# Altium PCB Contactor_Switching.pcbdoc
Units mil, origin at the board's own origin, x right, y up, seen from the top; angles counter-clockwise.
Board outline 5617.5 x 3410 mil, 2 copper layers (Top Layer, Bottom Layer); 30 components, 20 nets, 69 pads, 0 vias.
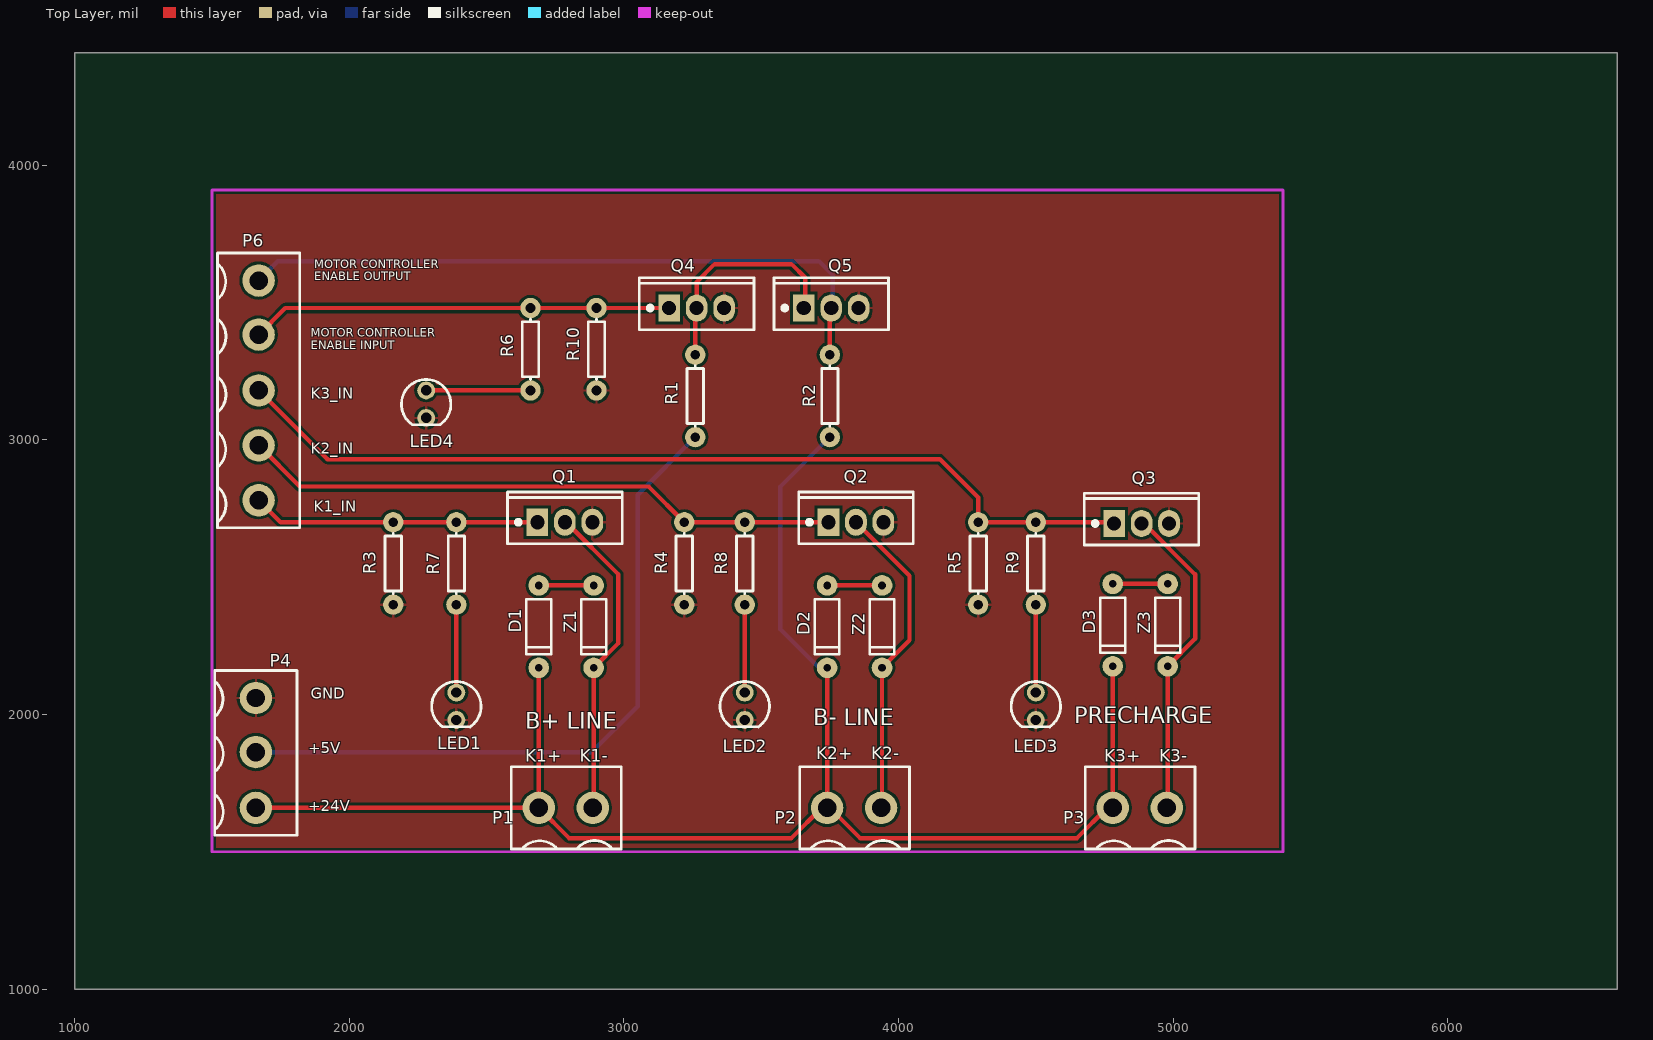
[diagram p0: Top Layer view]
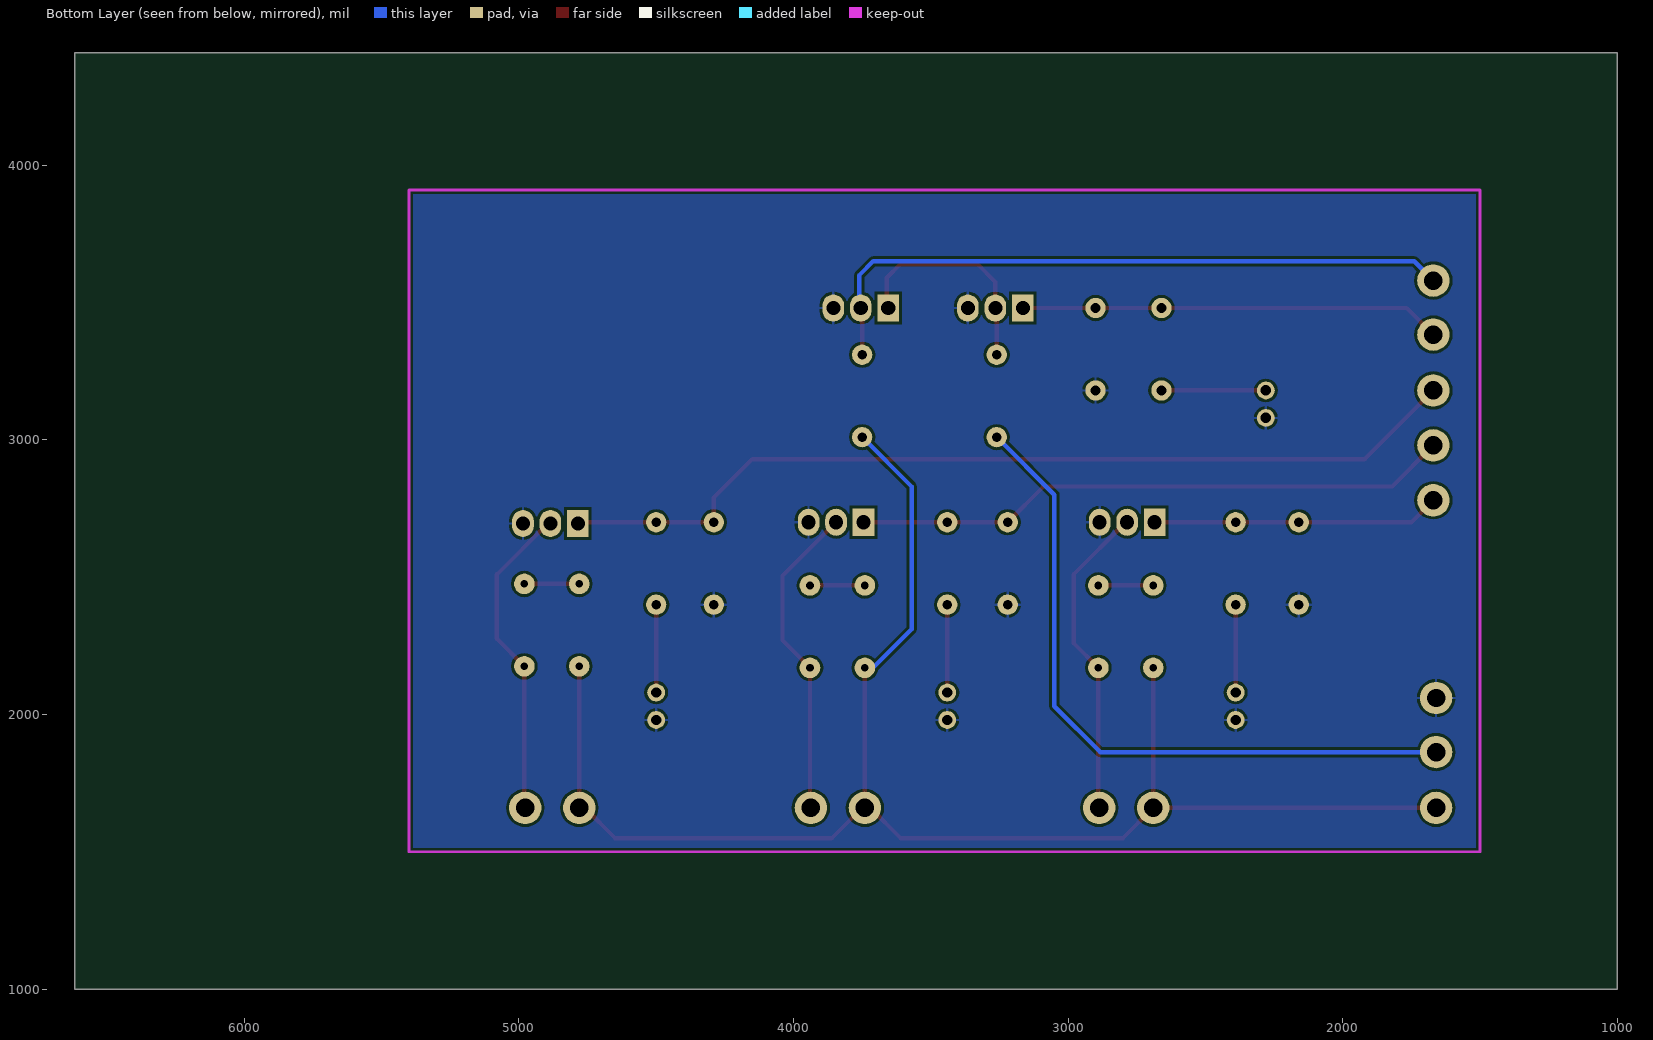
[diagram p1: Bottom Layer view, seen from below]

## Layer stack, top to bottom
Top Solder: solder mask 0.4, Solder Resist, Dk 3.5
Top Layer: signal copper 1.4
Dielectric1: dielectric 12.6, FR-4, Dk 4.8
Bottom Layer: signal copper 1.4
Bottom Solder: solder mask 0.4, Solder Resist, Dk 3.5

## Board outline
6617.5,1000 1000,1000 1000,4410 6617.5,4410

## Design rules (kind name [scope] priority, off if disabled: settings)
Clearance [All] p1: gap=10 ignorepadtopadclearanceinfootprint=FALSE except(0: Arc-Hole Track-Hole SMDPad-Hole THPad-Hole Via-Hole Fill-Hole Poly-Hole Region-Hole Text-Hole)
PolygonConnect [All] p1: connectstyle=Relief reliefconductorwidth=10 reliefentries=4 polygonreliefangle="90 Angle" airgapwidth=10
RoutingVias [All] p1: holewidth=28 width=50 viastyle="Through Hole" minholewidth=28 minwidth=50 maxholewidth=28 maxwidth=50
SolderMaskExpansion [All] p1: expansion=4
Width [All] p1: maxlimit=10 minlimit=10 preferedwidth=10
30 further rules are at their usual default settings.

## Components (designator, comment, footprint, x,y, rotation, side; value= is the part's Value field where it differs from the comment)
D1 "DO-35" DO-35 2690,2470 r270 top
D2 "DO-35" DO-35 3740,2470 r270 top
D3 "DO-35" DO-35 4780,2475.5 r270 top
LED1 "LED-3MM/2.54" LED-3MM/2.54 2390,2080 r0 top
LED2 "LED-3MM/2.54" LED-3MM/2.54 3440,2080 r0 top
LED3 "LED-3MM/2.54" LED-3MM/2.54 4500,2080 r0 top
LED4 "LED-3MM/2.54" LED-3MM/2.54 2280,3180 r0 top
P1 "WJ2EDGVC-5.08-2P" WJ2EDGVC-5.08-2P 2790,1660 r0 top
P2 "WJ2EDGVC-5.08-2P" WJ2EDGVC-5.08-2P 3840,1660 r0 top
P3 "WJ2EDGVC-5.08-2P" WJ2EDGVC-5.08-2P 4880,1660 r0 top
P4 "WJ2EDGVC-5.08-3P" WJ2EDGVC-5.08-3P 1660,1860 r270 top
P6 "WJ2EDGVC-5.08-5P" WJ2EDGVC-5.08-5P 1670,3180 r270 top
Q1 "TO-220(TO-220-3)" TO-220(TO-220-3) 2690,2700 r90 top
Q2 "TO-220(TO-220-3)" TO-220(TO-220-3) 3750,2700 r90 top
Q3 "TO-220(TO-220-3)" TO-220(TO-220-3) 4790,2695.5 r90 top
Q4 "TO-220(TO-220-3)" TO-220(TO-220-3) 3170,3480 r90 top
Q5 "TO-220(TO-220-3)" TO-220(TO-220-3) 3660,3480 r90 top
R1 "AXIAL-0.3" AXIAL-0.3 3260,3160 r270 top
R2 "AXIAL-0.3" AXIAL-0.3 3750,3160 r270 top
R3 "AXIAL-0.3" AXIAL-0.3 2160,2550 r90 top
R4 "AXIAL-0.3" AXIAL-0.3 3220,2550 r90 top
R5 "AXIAL-0.3" AXIAL-0.3 4290,2550 r90 top
R6 "AXIAL-0.3" AXIAL-0.3 2660,3330 r90 top
R7 "AXIAL-0.3" AXIAL-0.3 2390,2550 r90 top
R8 "AXIAL-0.3" AXIAL-0.3 3440,2550 r90 top
R9 "AXIAL-0.3" AXIAL-0.3 4500,2550 r90 top
R10 "AXIAL-0.3" AXIAL-0.3 2900,3330 r90 top
Z1 "DO-35" DO-35 2890,2470 r270 top
Z2 "DO-35" DO-35 3940,2470 r270 top
Z3 "DO-35" DO-35 4980,2475.5 r270 top

## Footprints (in the part's own frame and the unit in brackets; to place one, negate y for a bottom-side part, rotate by r counter-clockwise, add the part's x,y. Pads: shape width x height; smd on the part's side, far side on the other; paste and mask are expansions set on the pad)
AXIAL-0.3 [mil]
  round 74 hole 35.4: 1(-150,0) 2(150,0)
  silkscreen extent -110,-30 110,30
DO-35 [mil]
  round 75 hole 28: 1(0,0) 2(300,0)
  silkscreen extent 50,-45 250,45
LED-3MM/2.54 [mil]
  round 65 hole 38: 1(0,0) 2(0,-100)
  silkscreen extent -90,-125 90,40
TO-220(TO-220-3) [mm]
  rect 2.5x2 hole 1.3: 1(0,0.127)
  oval 2.5x2 hole 1.3: 2(0,-2.413) 3(0,-4.953)
  silkscreen extent -2,-7.71 2.8,2.89
WJ2EDGVC-5.08-2P [mm]
  round 3 hole 1.7: 1(-2.54,0) 2(2.459,0)
  silkscreen extent -5.08,-3.81 5.08,3.81
WJ2EDGVC-5.08-3P [mm]
  round 3 hole 1.7: 1(-5.08,0) 2(-0.081,0) 3(5.08,0)
  silkscreen extent -7.62,-3.81 7.62,3.81
WJ2EDGVC-5.08-5P [mm]
  round 3 hole 1.7: 1(-10.16,0) 2(-5.161,0) 3(0,0) 4(5.08,0) 5(10.16,0)
  silkscreen extent -12.7,-3.81 12.7,3.81

## Nets (pads, with @x,y where several pads share a name; then routed paths per layer and width w, separated by ;. In a path a pad name is that pad's centre, name@x,y a point inside that pad or via, vN(x,y) a via of type N, cw(c..) or ccw(c..) an arc to the next point about the centre after c; other vN are vias at no path point)
$BoardOutlineNet: 
+5V: P4.2 R1.2 | length 2526.1
  Bottom Layer w16: P4.2 2883.2,1863.2 3050,2030 3050,2800 R1.2
+24V: D1.2 D2.2 D3.2 P1.1 P2.1 P3.1 P4.3 R2.2 | length 5844.4
  Top Layer w16: P4.3 P1.1 ; D1.2 P1.1 ; D2.2 P2.1 ; D3.2 P3.1 4760,1660 4650,1550 3860,1550 3745,1665 P2.1 ; P1.1 2800,1550 3610,1550 3720,1660 P2.1
  Bottom Layer w16: D2.2 3710,2170 3570,2310 3570,2830 R2.2
GND: LED1.2 LED2.2 LED3.2 LED4.2 P4.1 Q1.3 Q2.3 Q3.3 Q4.3 Q5.3 R3.1 R4.1 R5.1 R10.1
LED1_1: LED1.1 R7.1 | length 320
  Top Layer w16: LED1.1 R7.1
LED2_1: LED2.1 R8.1 | length 320
  Top Layer w16: LED2.1 R8.1
LED4_1: LED4.1 R6.1 | length 380
  Top Layer w16: LED4.1 R6.1
P2_2: P2.2 Q2.2 Z2.2 | length 1163.5
  Top Layer w16: Q2.2 4040,2505 4040,2490 4040,2270 Z2.2 3940,1663.2 P2.2
P3_2: P3.2 Q3.2 Z3.2 | length 1164.6
  Top Layer w16: Q3.2 4894.5,2695.5 5080,2510 5080,2275.5 Z3.2 4980,1663.2 P3.2
Q4_2: Q4.2 Q5.1 R1.1 | length 821.8
  Top Layer w16: R1.1 3260,3475 Q4.2 3265,3575 3330,3640 3610,3640 3660,3590 3660,3485 Q5.1
Q5_2: P6.1 Q5.2 R2.1 | length 2433.8
  Top Layer w16: R2.1 3750,3475 Q5.2
  Bottom Layer w16: P6.1 1740,3650 3710,3650 3760,3600 3760,3485 Q5.2
R3_2: P6.5 Q1.1 R3.2 R7.2 | length 1048.1
  Top Layer w16: P6.5 1750,2700 R3.2 Q1.1
R4_2: P6.4 Q2.1 R4.2 R8.2 | length 2191
  Top Layer w16: P6.4 1820,2830 3090,2830 R4.2 Q2.1
R5_2: P6.3 Q3.1 R5.2 R9.2 | length 3368.4
  Top Layer w16: P6.3 1920,2930 1940,2930 4150,2930 4290,2790 R5.2 4780.5,2700 Q3.1
R6_2: P6.2 Q4.1 R6.2 R10.2 | length 1575.1
  Top Layer w16: P6.2 1766.8,3480 2440,3480 R10.2@2890,3480 ; 2850,3480 Q4.1
R9_1: LED3.1 R9.1 | length 320
  Top Layer w16: LED3.1 R9.1
Z1_1: D1.1 Z1.1 | length 200
  Top Layer w16: D1.1 Z1.1
Z1_2: P1.2 Q1.2 Z1.2 | length 1162.3
  Top Layer w16: Q1.2 2790,2700 2980,2510 2980,2260 Z1.2 2890,1663.2 P1.2
Z2_1: D2.1 Z2.1 | length 200
  Top Layer w16: D2.1 Z2.1
Z3_1: D3.1 Z3.1 | length 200
  Top Layer w16: D3.1 Z3.1

## Polygon pours and split planes (outlines as drawn)
GND on Bottom Layer "Bottom Layer-GND" (solid, pour order 0): 1500,3910 1500,1500 5400,1500 5400,3910
GND on Top Layer "Top Layer-GND" (solid, pour order 2): 1500,3910 1500,1500 5400,1500 5400,3910

## Silkscreen, mask and mechanical layers (free items; w line width, h text height)
Top Overlay:
  text "MOTOR CONTROLLER / ENABLE OUTPUT" at 1872,3580.6 h30
  text "MOTOR CONTROLLER / ENABLE INPUT" at 1860,3330 h30
  text "K3_IN" at 1860,3150 h40
  text "K2_IN" at 1860,2950 h40
  text "K1_IN" at 1870,2738.2 h40
  text "GND" at 1860,2058.2 h40
  text "PRECHARGE" at 4640,1967.3 h60
  text "B- LINE" at 3690,1960 h60
  text "B+ LINE" at 2640,1947.3 h60
  text "+5V" at 1850,1858.2 h40
  text "K2+" at 3700,1837.5 h45
  text "K2-" at 3900,1837.5 h45
  text "K1+" at 2640,1827.5 h45
  text "K1-" at 2840,1827.5 h45
  text "K3+" at 4750,1827.5 h45
  text "K3-" at 4950,1827.5 h45
  text "+24V" at 1850,1648.2 h40